# Altium PCB PCB1.PcbDoc
Units mm, origin at the board's own origin, x right, y up, seen from the top; angles counter-clockwise.
Board outline 52.25 x 30.25 mm, 2 copper layers (Top Layer, Bottom Layer); 57 components, 48 nets, 187 pads, 54 vias.
Unrouted connection lines stored in the file: 117.
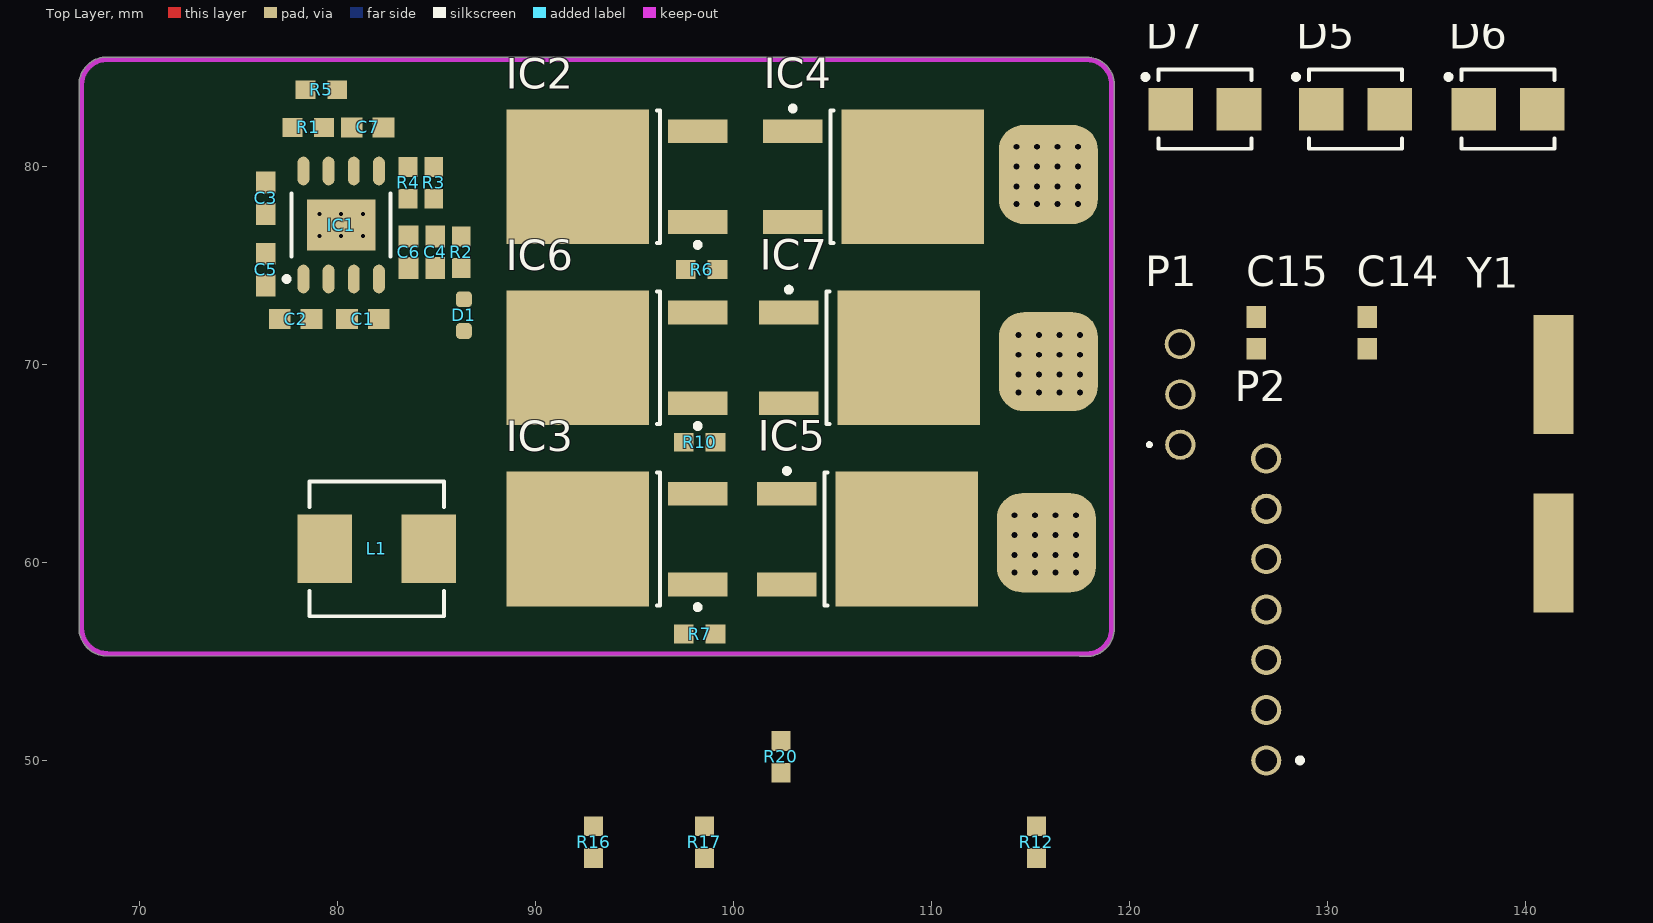
[diagram p0: Top Layer view]
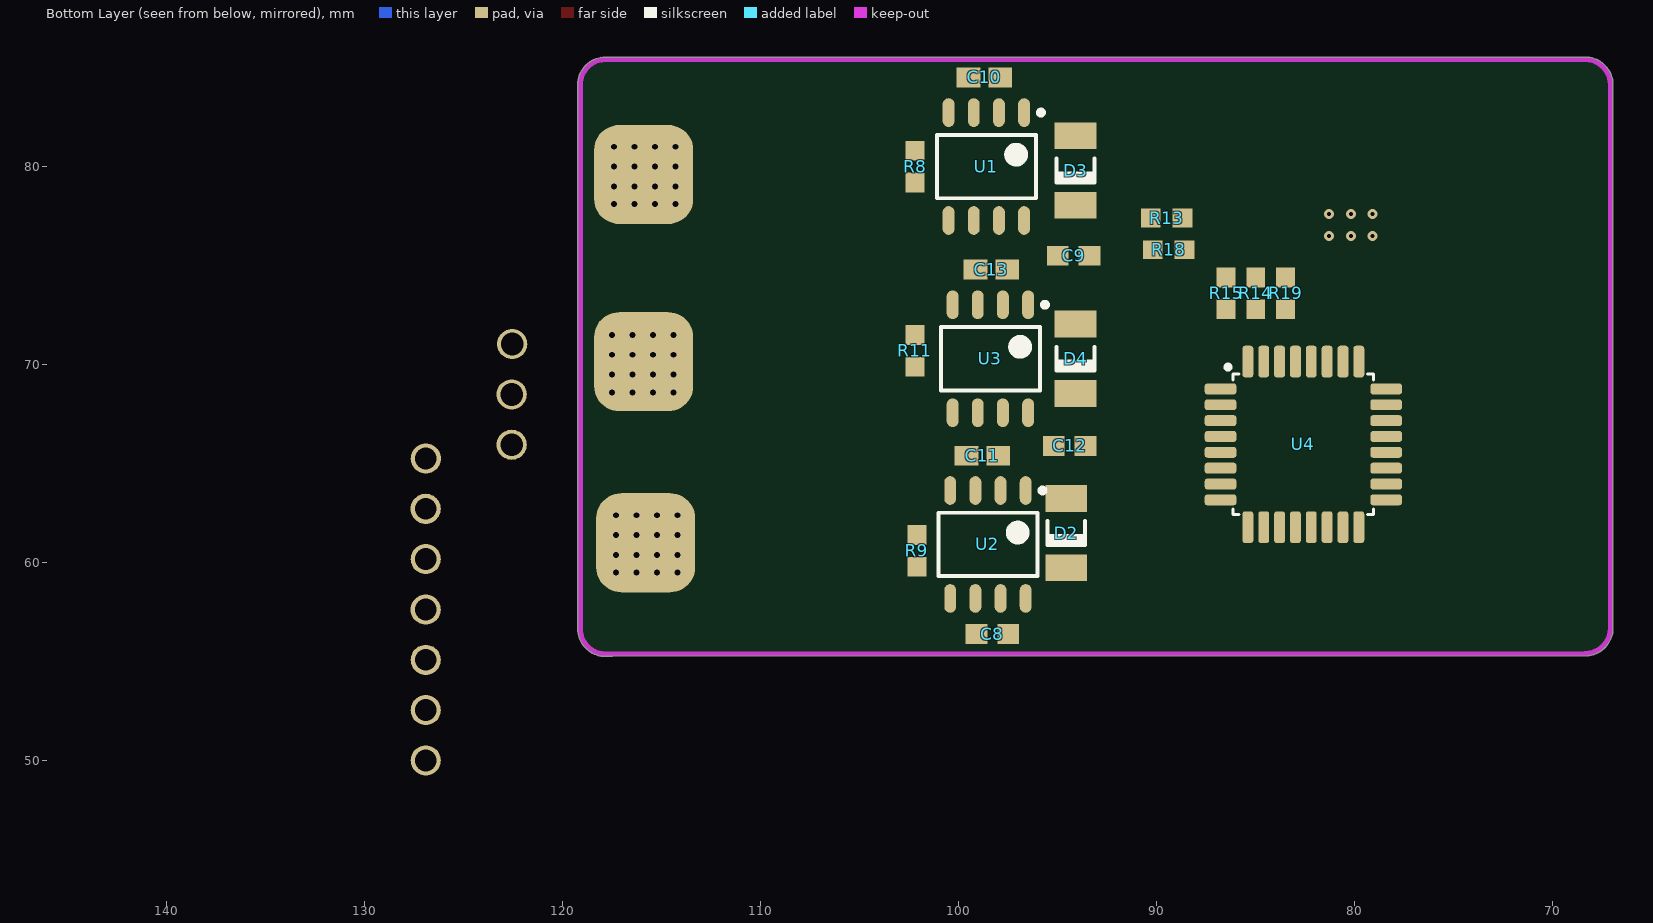
[diagram p1: Bottom Layer view, seen from below]

## Layer stack, top to bottom
Top Solder: solder mask 0.0102, Solder Resist, Dk 3.5
Top Layer: signal copper 0.0356
Dielectric 1: dielectric 0.32, FR-4, Dk 4.8
Bottom Layer: signal copper 0.0356
Bottom Solder: solder mask 0.0102, Solder Resist, Dk 3.5

## Board outline
66.973,56.7 ccw(c68.37,56.7) 68.177,55.316 68.24,55.3 117.5,55.273 117.83,55.273 ccw(c117.83,56.67) 119.227,56.67 119.227,84.13 ccw(c117.83,84.13) 117.831,85.527 117.83,85.527 68.371,85.527 68.37,85.527 ccw(c68.37,84.13) 66.973,84.13

## Design rules (kind name [scope] priority, off if disabled: settings)
Clearance "Clearance for EARTH" [InNet('EARTH') vs InNet('GND')] p1: gap=1 ignorepadtopadclearanceinfootprint=TRUE
Clearance "Clearance General" [All] p2: gap=0.254 ignorepadtopadclearanceinfootprint=TRUE except(0.152: Arc-Arc Arc-Track Arc-SMDPad Arc-Poly Track-Track Track-Poly SMDPad-SMDPad SMDPad-Poly THPad-Poly Via-Poly Fill-Poly Poly-Poly; 0.2: Track-THPad)
DiffPairsRouting Diff100 [InDifferentialPairClass('DIFF100')] p1: maxlimit=0.3 minlimit=0.127 mostfreqgap=0.127 toplayer_minwidth=0.116 toplayer_maxwidth=0.116 toplayer_prefwidth=0.116 bottomlayer_minwidth=0.116 bottomlayer_maxwidth=0.116 bottomlayer_prefwidth=0.116 impedanceprofiledriven=TRUE impedanceprofileid={629E0CA5-21C3-4CA6-A62A-6AAFF73C2E2F} maxuncoupledlength=12.7
DiffPairsRouting Diff90 [InDifferentialPairClass('DIFF100')] p2: maxlimit=0.3 minlimit=0.127 mostfreqgap=0.127 toplayer_minwidth=0.15 toplayer_maxwidth=0.15 toplayer_prefwidth=0.15 bottomlayer_minwidth=0.15 bottomlayer_maxwidth=0.15 bottomlayer_prefwidth=0.15 impedanceprofiledriven=TRUE impedanceprofileid={F15CAFDC-E6BC-4055-B4AB-5316CE726968} maxuncoupledlength=12.7
HoleSize [All] p1: absolutevalues=TRUE maxlimit=6.35 minlimit=0.25 maxpercent=80.000 minpercent=20.000
MinimumSolderMaskSliver [All] p1: minsoldermaskwidth=0.09
PlaneConnect [All] p1: planeconnectstyle=Direct reliefexpansion=0.508 reliefentries=4 reliefconductorwidth=0.254 reliefairgap=0.254
PolygonConnect [All] p1: connectstyle=Direct reliefconductorwidth=0.254 reliefentries=4 polygonreliefangle="90 Angle" airgapwidth=0.254
RoutingVias [All] p1: holewidth=0.3 width=0.6 viastyle="Through Hole" minholewidth=0.25 minwidth=0.45 maxholewidth=0.9 maxwidth=1.27
SilkToSilkClearance [All] p1: silktosilkclearance=0.17
SilkToSolderMaskClearance [IsText] p1: minsilkscreentomaskgap=0.254 clearancetoexposedcopper=TRUE
SolderMaskExpansion [All] p1: expansion=0.045 istentingtop=FALSE
Width [All] p1: maxlimit=2 minlimit=0.152 preferedwidth=0.254
24 further rules are at their usual default settings.

## Classes and differential pairs
component class MP2307: C1 C2 C3 C4 C5 C6 C7 D1 IC1 L1 R1 R2 R3 R4 R5
component class MosfetDrivers: C8 C9 C10 C11 C12 C13 D2 D3 D4 D5 D6 D7 IC2 IC3 IC4 IC5 IC6 IC7 R6 R7 R8 R9 R10 R11 U1 U2 U3
component class Atmega328PB: C14 C15 P1 P2 R12 R13 R14 R15 R16 R17 R18 R19 R20 U4 Y1

## Components (designator, comment, footprint, x,y, rotation, side; value= is the part's Value field where it differs from the comment)
C1 "10nF 50VDC" 0603_UnP_Capacitor 81.3,72.3 r180 top
C2 "10uF 25VDC" 0603_UnP_Capacitor 77.9,72.3 r180 top
C3 "100nF 50VDC" 0603_UnP_Capacitor 76.4,78.4 r90 top
C4 "22uF 6.3VDC" 0603_UnP_Capacitor 84.948,75.675 r90 top
C5 "10uF 25VDC" 0603_UnP_Capacitor 76.4,74.8 r270 top
C6 "22uF 6.3VDC" 0603_UnP_Capacitor 83.604,75.675 r90 top
C7 "3.9nF 50VDC" 0603_UnP_Capacitor 81.534,81.975 r180 top
C8 "2.2uF 50VDC" 0603_UnP_Capacitor 98.3,56.4 r0 bottom
C9 "2.2uF 50VDC" 0603_UnP_Capacitor 94.2,75.5 r0 bottom
C10 "10uF 50VDC" 0805_Capacitor_Special_CC0805KKX7R9BB106 98.7,84.5 r180 bottom
C11 "10uF 50VDC" 0805_Capacitor_Special_CC0805KKX7R9BB106 98.8,65.4 r180 bottom
C12 "2.2uF 50VDC" 0603_UnP_Capacitor 94.4,65.9 r0 bottom
C13 "10uF 50VDC" 0805_Capacitor_Special_CC0805KKX7R9BB106 98.35,74.8 r180 bottom
C14 "18pF 50VDC" 0603_UNP_CAP 132,71.6 r90 top
C15 "18pF 50VDC" 0603_UNP_CAP 126.4,71.6 r90 top
D1 "0603 LED RED" "LED DIODE 0603" 86.4,72.5 r270 top
D2 "500mA 100V" 1N4148_DIODE 94.571,61.5 r270 bottom
D3 "500mA 100V" 1N4148_DIODE 94.1,79.8 r270 bottom locked
D4 "500mA 100V" 1N4148_DIODE 94.1,70.3 r270 bottom
D5 "SMBJ18CA" SMBJ18CA-TKS 131.4,82.9 r0 top
D6 "SMBJ18CA" SMBJ18CA-TKS 139.1,82.9 r0 top
D7 "SMBJ18CA" SMBJ18CA-TKS 123.8,82.9 r0 top
IC1 "Buck Converter" MP2307_SOIC127P600X170_HS-9N 80.204,77.05 r90 top
IC2 "IRLR7843TRPBF - 161A 30V" IRLR7843_DPAK229P991X239-3N 94.1,79.49 r180 top locked
IC3 "IRLR7843TRPBF - 161A 30V" IRLR7843_DPAK229P991X239-3N 94.1,61.2 r180 top locked
IC4 "IRLR7843TRPBF - 161A 30V" IRLR7843_DPAK229P991X239-3N 107.1,79.49 r0 top locked
IC5 "IRLR7843TRPBF - 161A 30V" IRLR7843_DPAK229P991X239-3N 106.8,61.2 r0 top locked
IC6 "IRLR7843TRPBF - 161A 30V" IRLR7843_DPAK229P991X239-3N 94.1,70.345 r180 top locked
IC7 "IRLR7843TRPBF - 161A 30V" IRLR7843_DPAK229P991X239-3N 106.9,70.345 r0 top locked
L1 "10UH 4A" IHLP-2525CZ-11_INDUCTOR 82,60.7 r0 top
P1 "3-Pin Female Header 2.54mm" "1X3 PIN FEMALE HEADER 2.54MM" 122.8,68.5 r90 top
P2 "7-Pin Female Header 2.54mm" "SINGLE 7-PIN (2.54MM) FEMALE HEADER" 126.276,57.172 r90 top
R1 "100K Ohms 1% 1/4W" 0603_RESISTOR_CASE 78.54,81.975 r180 top
R2 "100 Ohms 1% 1/10W" 0603_RESISTOR_CASE 86.267,75.675 r270 top
R3 "44.2K Ohms 0.1% 1/10W" 0603_RESISTOR_CASE 84.873,79.175 r90 top
R4 "10K Ohms 1% 1/10W" 0603_RESISTOR_CASE 83.579,79.175 r90 top
R5 "6.8K Ohms 5% 1/10W" 0603_RESISTOR_CASE 79.201,83.875 r0 top
R6 "100 Ohms 1% 1/10W" 0603_RESISTOR_CASE 98.4,74.8 r0 top
R7 "100 Ohms 1% 1/10W" 0603_RESISTOR_CASE 98.3,56.4 r0 top
R8 "100 Ohms 1% 1/10W" 0603_RESISTOR_CASE 102.2,80 r90 bottom locked
R9 "100 Ohms 1% 1/10W" 0603_RESISTOR_CASE 102.109,60.6 r90 bottom
R10 "100 Ohms 1% 1/10W" 0603_RESISTOR_CASE 98.3,66.081 r0 top
R11 "100 Ohms 1% 1/10W" 0603_RESISTOR_CASE 102.209,70.7 r90 bottom
R12 "33K Ohms 5% 1/10W-S" 0603_RESISTOR_CASE 115.3,45.9 r90 top
R13 "33K Ohms 5% 1/10W-S" 0603_RESISTOR_CASE 89.5,77.4 r180 bottom
R14 "33K Ohms 5% 1/10W-S" 0603_RESISTOR_CASE 85,73.6 r90 bottom
R15 "33K Ohms 5% 1/10W-S" 0603_RESISTOR_CASE 86.5,73.6 r270 bottom
R16 "33K Ohms 5% 1/10W-S" 0603_RESISTOR_CASE 92.948,45.9 r90 top
R17 "33K Ohms 5% 1/10W-S" 0603_RESISTOR_CASE 98.536,45.9 r90 top
R18 "10K Ohms 1% 1/10W" 0603_RESISTOR_CASE 89.4,75.8 r0 bottom
R19 "10K Ohms 1% 1/10W" 0603_RESISTOR_CASE 83.5,73.6 r90 bottom
R20 "10K Ohms 1% 1/10W" 0603_RESISTOR_CASE 102.4,50.2 r90 top
U1 "IR2101" IR2101_SOIC127P600X175-8N 98.6,80 r270 bottom
U2 "IR2101" IR2101_SOIC127P600X175-8N 98.521,60.926 r270 bottom
U3 "IR2101" IR2101_SOIC127P600X175-8N 98.4,70.3 r270 bottom
U4 "ATMEGA328PB-AU" ATMEGA328PB-AU 82.6,65.976 r180 bottom
Y1 "CRYSTAL 16MHZ 20PF" 16MHZ_CRSYTALOSCILLATOR 141.4,65 r90 top

## Footprints (in the part's own frame and the unit in brackets; to place one, negate y for a bottom-side part, rotate by r counter-clockwise, add the part's x,y. Pads: shape width x height; smd on the part's side, far side on the other; paste and mask are expansions set on the pad)
1N4148_DIODE [mm] "MELF Diode, 2-Leads, Body 3,60x1,80mm, IPC Medium Density"
  rect 1.35x2.1 smd: 1(-1.75,0) 2(1.75,0)
  silkscreen extent -0.6,-0.95 0.6,0.95, body extent -1.95,-1 1.95,1, height 2
"1X3 PIN FEMALE HEADER 2.54MM" [mil] "2.54mm"
  round 60 hole 45.28: 1(-100.13,9.38) 2(0,9.38) 3(100.13,10.31)
  silkscreen extent -102,69 -98,73, body extent -160,-39 160,59, height 197
16MHZ_CRSYTALOSCILLATOR [mm]
  rect 6x2 smd: 1(-4.5,0) 2(4.5,0)
0603_RESISTOR_CASE [mm] "Chip Resistor, 2-Leads, Body 1,70x0,88mm, IPC Medium Density"
  rect 1x0.95 smd: 1(-0.8,0) 2(0.8,0)
  body extent -0.9,-0.48 0.9,0.48, height 0.6
0603_UNP_CAP [mm]
  rect 1.1x1 smd: 1(-0.8,0) 2(0.8,0)
  body extent -0.9,-0.48 0.9,0.48, height 0.9
0603_UnP_Capacitor [mm]
  rect 1.1x1 smd: 1(-0.8,0) 2(0.8,0)
  body extent -0.9,-0.48 0.9,0.48, height 0.9
0805_Capacitor_Special_CC0805KKX7R9BB106 [mm]
  rect 1.2x1 smd: 1(-0.8,0) 2(0.8,0)
  body extent -1.1,-0.72 1.1,0.72, height 0.9
ATMEGA328PB-AU [mm]
  rrect50% 1.6x0.55 smd: 1(-4.18,2.8) 2(-4.18,2) 3(-4.18,1.2) 4(-4.18,0.4) 5(-4.18,-0.4) 6(-4.18,-1.2) 7(-4.18,-2) 8(-4.18,-2.8) 17(4.18,-2.8) 18(4.18,-2) 19(4.18,-1.2) 20(4.18,-0.4) 21(4.18,0.4) 22(4.18,1.2) 23(4.18,2) 24(4.18,2.8)
  rrect50% 0.55x1.6 smd: 9(-2.8,-4.18) 10(-2,-4.18) 11(-1.2,-4.18) 12(-0.4,-4.18) 13(0.4,-4.18) 14(1.2,-4.18) 15(2,-4.18) 16(2.8,-4.18) 25(2.8,4.18) 26(2,4.18) 27(1.2,4.18) 28(0.4,4.18) 29(-0.4,4.18) 30(-1.2,4.18) 31(-2,4.18) 32(-2.8,4.18)
  silkscreen extent -3.9,-3.55 3.55,4, body extent -4.5,-4.5 4.5,4.5, height 1
IHLP-2525CZ-11_INDUCTOR [mm] "Molded Inductor, 2-Leads, Body 6,60x6,60mm, IPC Medium Density"
  rect 2.75x3.45 smd: 1(-2.625,0) 2(2.625,0)
  silkscreen extent -3.4,-3.4 3.4,3.4, body extent -3.62,-3.4 3.62,3.4, height 3
IR2101_SOIC127P600X175-8N [mm] "SOIC, 8-Leads, Body 4,90x3,90mm, Pitch 1,27mm, IPC Medium Density"
  oval 1.45x0.6 smd: 1(-2.725,1.905) 2(-2.725,0.635) 3(-2.725,-0.635) 4(-2.725,-1.905) 5(2.725,-1.905) 6(2.725,-0.635) 7(2.725,0.635) 8(2.725,1.905)
  silkscreen extent -2.85,-2.5 1.6,2.88, body extent -2,-2.5 2,2.5, height 1.75
IRLR7843_DPAK229P991X239-3N [mm] "D-PAK, 3-Pads, Body 6,21x6,73mm (max), IPC Medium Density"
  rect 3x1.2 smd: 1(-4.1,2.29) 3(-4.1,-2.29)
  rect 7.2x6.8 smd: 4(1.95,0)
  silkscreen extent -4.23,-3.35 -2.05,3.56, body extent -4.35,-3.37 5.56,3.37, height 2.52
"LED DIODE 0603" [mm] "0603"
  rrect50% 0.8x0.8 smd: +(-0.8,0) -(0.8,0)
  body extent -0.8,-0.4 0.8,0.4, height 0.55
MP2307_SOIC127P600X170_HS-9N [mm] "SOIC, 8-Leads, Body 4,90x3,90mm, Pitch 1,27mm, Thermal Pad 3,45x2,56mm, IPC Medium Density"
  oval 1.45x0.6 smd: 1(-2.725,1.905) 2(-2.725,0.635) 3(-2.725,-0.635) 4(-2.725,-1.905) 5(2.725,-1.905) 6(2.725,-0.635) 7(2.725,0.635) 8(2.725,1.905)
  rect 2.56x3.45 smd: 9(0,0)
  silkscreen extent -2.85,-2.5 1.6,2.88, body extent -2,-2.5 2,2.5, height 1.7
"SINGLE 7-PIN (2.54MM) FEMALE HEADER" [mil]
  round 60 hole 43.31: 1(-281.5,-24.6) 2(-181.3,-24.6) 3(-81.57,-24.58) 4(18.31,-24.74) 5(118.75,-24.56) 6(218.63,-24.72) 7(318.51,-24.43)
  silkscreen extent -286,-96 -276,-87, body extent -341,-74 378,25, height 197
SMBJ18CA-TKS [mm] "Molded Capacitor, 2-Leads, Body 4,38x3,62mm, IPC Medium Density"
  rect 2.25x2.15 smd: 1(-1.725,0) 2(1.725,0)
  silkscreen extent -3.12,-2 2.35,2, body extent -2.57,-1.97 2.57,1.97, height 2.7

## Part data
C1: library part "CL10B103KB8NNNC - MLCC (1608) 0603 10nF 50VDC ±10% X7R", "CL10B103KB8NNNC - MLCC (1608) 0603 10nF 50VDC ±10% X7R", Capacitor Type=Unpolarized, Capacitor Value=10nF, Manufacturer=SAMSUNG, Max Working Voltage=50V, Package / Case=0603, Part Number=CL10B103KB8NNNC, ComponentLink1Description="New link", ComponentLink1URL=https://www.ozdisan.com/passive-components/resistors/smt-smd-and-chip-resistors/PS03W4F1003T5E/592727, Library Ref=Capacitors
C2 C5: library part "MCF03MTX250106 - MLCC 0603 10uF 25VDC ±20% X5R", "MCF03MTX250106 - MLCC (1608) 0603 10uF 25VDC ±20% X5R", Capacitor Type=Ceramic, Capacitor Value=10uF, Manufacturer=VIKING, Max Working Voltage=25VDC, Package / Case=0603, Part Number=MCF03MTX250106, ComponentLink1Description="New link", ComponentLink1URL=https://www.ozdisan.com/passive-components/resistors/smt-smd-and-chip-resistors/PS03W4F1003T5E/592727, Library Ref=Capacitors
C3: library part "MCF03KTB500104 - MLCC 0603 100nF 50VDC ±10% X7R", "MCF03KTB500104 - MLCC (1608) 0603 100nF 50VDC ±10% X7R", Capacitor Type=Ceramic, Capacitor Value=100nF, Manufacturer=VIKING, Max Working Voltage=50VDC, Package / Case=0603, Part Number=MCF03MTX250106, ComponentLink1Description="New link", ComponentLink1URL=https://www.ozdisan.com/passive-components/resistors/smt-smd-and-chip-resistors/PS03W4F1003T5E/592727, Library Ref=Capacitors
C4 C6: library part "CL10A226MQ8NRNC - MLCC (1608) 0603 22uF 6.3VDC ±20% X5R", "CL10A226MQ8NRNC - MLCC (1608) 0603 22uF 6.3VDC ±20% X5R", Capacitor Type=Unpolarized, Capacitor Value=22uF, Manufacturer=SAMSUNG, Max Working Voltage=6.3V, Package / Case=0603, Part Number=CL10B103KB8NNNC, ComponentLink1Description="New link", ComponentLink1URL=https://www.ozdisan.com/passive-components/capacitors/smt-smd-and-mlcc-capacitors/CL10B392KB8NNNC/26336, Library Ref=Capacitors
C7: library part "CL10B392KB8NNNC - MLCC (1608) 0603 3.9nF 50VDC ±10% X7R", "CL10B392KB8NNNC - MLCC (1608) 0603 3.9nF 50VDC ±10% X7R", Capacitor Type=Unpolarized, Capacitor Value=3.9nF, Manufacturer=SAMSUNG, Max Working Voltage=50V, Package / Case=0603, Part Number=CL10B103KB8NNNC, ComponentLink1Description="New link", ComponentLink1URL=https://www.ozdisan.com/passive-components/capacitors/smt-smd-and-mlcc-capacitors/CL10B392KB8NNNC/26336, Library Ref=Capacitors
C8 C9 C12: library part "UMK107BBJ225KA-T - MLCC 0603 2.2uF 50VDC ±10% X5R", "UMK107BBJ225KA-T - MLCC 0603 2.2uF 50VDC ±10% X5R", Capacitor Type=Ceramic, Capacitor Value=2.2uF, Manufacturer=YUDEN, Max Working Voltage=50V, Package / Case=0603, Part Number=UMK107BBJ225KA-T, ComponentLink1Description="New link", ComponentLink1URL=https://www.ozdisan.com/passive-components/resistors/smt-smd-and-chip-resistors/PS03W4F1003T5E/592727, Library Ref=Capacitors
C10 C11 C13: library part "CC0805KKX7R9BB106 - MLCC 0805 10uF 50VDC ±10% X7R", "CC0805KKX7R9BB106 - MLCC 0805 10uF 50VDC ±10% X7R", Capacitor Type=Unpolarized, Capacitor Value=10uF, Manufacturer=YAGEO, Max Working Voltage=50VDC, Package / Case=0805, Part Number=CC0805KKX7R9BB106, ComponentLink1Description="New link", ComponentLink1URL=https://www.ozdisan.com/passive-components/capacitors/smt-smd-and-mlcc-capacitors/CL10B392KB8NNNC/26336, Library Ref=Capacitors
C14 C15: library part "MCF03JTN500180 - MLCC 0603 18pF 50VDC ±5% C0G (NP0)", "MCF03JTN500180 - MLCC (1608) 0603 18pF 50VDC ±5% C0G (NP0)", Capacitor Type=Ceramic, Capacitor Value=18pF, Manufacturer=VIKING, Max Working Voltage=50VDC, Package / Case=0603, Part Number=MCF03MTX250106, ComponentLink1Description="New link", ComponentLink1URL=https://www.ozdisan.com/passive-components/resistors/smt-smd-and-chip-resistors/PS03W4F1003T5E/592727, Library Ref=Capacitors
D1: Color=Red, Package / Case=0603, Library Ref=LED, Type=SMD
D2 D3 D4: library part "1N4148-35_AY_10001 - DIODE SWITCHING Single 500mA 100V THT DO35", "1N4148-35_AY_10001 - DIODE SWITCHING Single 500mA 100V THT DO35", Diode Types=Switching, Library Ref=Diodes
D5 D6 D7: library part "SMBJ18CA-TKS - DIODE TVS 600W 18V DO214AA", "SMBJ18CA-TKS - DIODE TVS 600W 18V DO214AA (SMB) SMT", Package=SMD, Availability=Available, Diode Direction=Bidirectional, Library Ref=Diodes, MF="THINKING ELECTRONIC", MP=SMBJ18CA-TKS, Price=None, Type=TVS
IC1: library part MP2307, "3A and 4.75V-23V voltage regulator.", Package / Case=SMD, Converter Type=Buck, Library Ref="Voltage Regulators"
IC2 IC3 IC4 IC5 IC6 IC7: library part "IRLR7843TRPBF - MOSFET DIS.161A 30V N-CH TO252(DPAK) HEXFET SMT", "IRLR7843TRPBF - MOSFET DIS.161A 30V N-CH TO252(DPAK) HEXFET SMT", Package / Case=D-Pack, Library Ref=Mosfets, Mosfet Type=N
L1: library part "IHLP2525CZER100M11 - INDUCTOR FIXED 10UH 4A 71.2MOHM SMD", "IHLP2525CZER100M11 - INDUCTOR FIXED 10UH 4A 71.2MOHM SMD", Package / Case=THT, Rated Current (Max)=4A, Working Voltage (Max)=50V, Inductance Value="10 µH", Inductor Type="Iron Core", Library Ref=Inductors
P1: library part "Single 3-Pin (2.54mm) Female Header", Library Ref=Header
P2: library part "Single 7-Pin (2.54mm) Female Header", Library Ref=Header
R1: library part "PS03W4F1003T5E - 0603 100K Ohms 1% 1/4W AUTOMOTIV", "RES.(1608) 0603 100K Ohms 1% 1/4W AUTOMOTIV PS03W4F1003T5E", Manufacturer=ROYALOHM, Max Working Voltage=50V, Package / Case=0603, Part Number=PS03W4F1003T5E, Power (Watts)=1/4W, Resistor Value="100K Ohms", ComponentLink1Description="New link", ComponentLink1URL=https://www.ozdisan.com/passive-components/resistors/smt-smd-and-chip-resistors/PS03W4F1003T5E/592727, Library Ref=Resistors
R2 R6 R7 R8 R9 R10 R11: library part "CQ03SAF1000T5E - 0603 100 Ohms 1% 1/10W AUTOMOTIV", "CQ03SAF1000T5E - 0603 100 Ohms 1% 1/10W AUTOMOTIV", Manufacturer=ROYALOHM, Package / Case=0603, Part Number=CQ03SAF1000T5E, Power (Watts)=1/10W, Resistor Value="100 Ohms", Working Voltage (Max)=75V, ComponentLink1Description="New link", ComponentLink1URL=https://www.ozdisan.com/passive-components/resistors/smt-smd-and-chip-resistors/PS03W4F1003T5E/592727, Library Ref=Resistors
R3: library part "TC0325B4422T5F - 0603 44.2K Ohms 0.1% 1/10W 25PPM", "TC0325B4422T5F - RES.(1608) 0603 44.2K Ohms 0.1% 1/10W 25PPM", Manufacturer=ROYALOHM, Max Working Voltage=50V, Package / Case=0603, Part Number=RI0603L104JT, Power (Watts)=1/10W, Resistor Value="44.2K Ohms", ComponentLink1Description="New link", ComponentLink1URL=https://www.ozdisan.com/passive-components/resistors/smt-smd-and-chip-resistors/PS03W4F1003T5E/592727, Library Ref=Resistors
R4 R18 R19 R20: library part "RC0603FR-0710KL - 0603 10K Ohms 1% 1/10W 100PPM", "RC0603FR-0710KL - 0603 10K Ohms 1% 1/10W 100PPM", Manufacturer=HOTTECH, Max Working Voltage=75V, Package / Case=0603, Part Number=PS03W4F1003T5E, Power (Watts)=1/10W, Resistor Value="10K Ohms", ComponentLink1Description="New link", ComponentLink1URL=https://www.ozdisan.com/passive-components/resistors/smt-smd-and-chip-resistors/PS03W4F1003T5E/592727, Library Ref=Resistors
R5: library part "RC0603JR-076K8L - 0603 6.8K Ohms 5% 1/10W 100PPM", "RC0603JR-076K8L - 0603 6.8K Ohms 5% 1/10W 100PPM", Manufacturer=YAGEO, Max Working Voltage=75V, Package / Case=0603, Part Number=RC0603JR-076K8L, Power (Watts)=1/10W, Resistor Value="6.8K Ohms", ComponentLink1Description="New link", ComponentLink1URL=https://www.ozdisan.com/passive-components/resistors/smt-smd-and-chip-resistors/PS03W4F1003T5E/592727, Library Ref=Resistors
R12 R13 R14 R15 R16 R17: library part "0603SAJ0333T5E - RES. 0603 33K Ohms 5% 1/10W-S 100PPM", "0603SAJ0333T5E - RES.(1608) 0603 33K Ohms 5% 1/10W-S 100PPM", Manufacturer=ROYALOHM, Package / Case=0603, Part Number=0603SAJ0333T5E, Power (Watts)=1/10W, Resistor Value="33K Ohms", Working Voltage (Max)=75V, ComponentLink1Description="New link", ComponentLink1URL=https://www.ozdisan.com/passive-components/resistors/smt-smd-and-chip-resistors/PS03W4F1003T5E/592727, Library Ref=Resistors
U1 U2 U3: "High Speed power MOSFET and IGBT driver", Library Ref="Mosfet Controllers"
U4: "ATmega Series 20 MHz 32 KB Flash 2 KB SRAM 8-Bit Microcontroller - TQFP-32", Package / Case=SMD, Availability=Unavailable, Library Ref=Microprocessors, MF="{'manufacturer': u'Microchip Technology'}", Name=ATMEGA328PB-AU, Price=None
Y1: library part "AS-16.000-20-SMD-TR - CRYSTAL 16.0000MHZ 20PF SMD", "AS-16.000-20-SMD-TR - CRYSTAL 16.0000MHZ 20PF SMD", Package / Case=SMD, Part Number=AS-16.000-20-SMD-TR, Button Size=12mm, Library Ref=Oscillator, Oscillator Type=Crystal

## Free pads (board coordinates)
  rrect50% 5x5 smd: 1(115.9,79.6) 2(115.9,70.155) 3(115.8,61.01)
  rrect50% 5x5 smd far side: 1(115.9,79.6) 2(115.9,70.155) 3(115.8,61.01)

## Via types
v1: diameter 0.5, hole 0.3, Top Layer to Bottom Layer, 48 vias
v2: diameter 0.5, hole 0.2, Top Layer to Bottom Layer, 6 vias

## Nets (pads, with @x,y where several pads share a name; then routed paths per layer and width w, separated by ;. In a path a pad name is that pad's centre, name@x,y a point inside that pad or via, vN(x,y) a via of type N, cw(c..) or ccw(c..) an arc to the next point about the centre after c; other vN are vias at no path point)
A0: R12.2 R13.1 R18.2 U4.23
A1: R14.2 R15.1 R19.2 U4.24
A2: R16.2 R17.1 R20.2 U4.25
GND: C3.1 C5.1 C6.1 C10.1 C11.1 C13.1 C14.1 C15.1 D1.- IC1.4 IC4.3 IC5.3 IC7.3 P1.3 P2.1 R4.1 R5.1 R18.1 R19.1 R20.1 U1.4 U2.4 U3.4 U4.5 U4.21
MCU_MISO: P2.6 U4.16
MCU_MOSI: P2.7 U4.15
MCU_RESET: P2.4 U4.29
MCU_SCK0: P2.5 U4.17
NetC1_1: C1.1 IC1.3 L1.1
NetC1_2: C1.2 IC1.1
NetC2_2: C2.2 C5.2
NetC3_2: C3.2 IC1.8
NetC4_1: C4.1 C6.2
NetC7_1: C7.1 R5.2
NetC7_2: C7.2 IC1.6
NetC8_1: C8.1 D2.2 U2.8
NetC8_2: C8.2 IC3.3 IC5.4 pad.3 R17.2 U2.6
  other v1: 114.2,59.5 115.233,59.5 116.267,59.5 117.3,59.5 114.2,60.4 115.233,60.4 116.267,60.4 117.3,60.4 114.2,61.4 115.233,61.4 116.267,61.4 117.3,61.4 114.2,62.4 115.233,62.4 116.267,62.4 117.3,62.4
NetC9_1: C9.1 D3.2 U1.8
NetC9_2: C9.2 IC2.3 IC4.4 pad.1 R13.2 U1.6
  other v1: 114.3,78.1 115.333,78.1 116.367,78.1 117.4,78.1 114.3,79 115.333,79 116.367,79 117.4,79 114.3,80 115.333,80 116.367,80 117.4,80 114.3,81 115.333,81 116.367,81 117.4,81
NetC12_1: C12.1 D4.2 U3.8
NetC12_2: C12.2 IC6.3 IC7.4 pad.2 R15.2 U3.6
  other v1: 114.4,68.6 115.433,68.6 116.467,68.6 117.5,68.6 114.4,69.5 115.433,69.5 116.467,69.5 117.5,69.5 114.4,70.5 115.433,70.5 116.467,70.5 117.5,70.5 114.4,71.5 115.433,71.5 116.467,71.5 117.5,71.5
NetD1_+: D1.+ R2.2
NetR1_1: IC1.7 R1.1
NetR3_2: IC1.5 R3.2 R4.2
NetR6_1: R6.1 U1.7
NetR6_2: IC2.1 R6.2
NetR7_1: R7.1 U2.7
NetR7_2: IC3.1 R7.2
NetR8_1: R8.1 U1.5
NetR8_2: IC4.1 R8.2
NetR9_1: R9.1 U2.5
NetR9_2: IC5.1 R9.2
NetR10_1: R10.1 U3.7
NetR10_2: IC6.1 R10.2
NetR11_1: R11.1 U3.5
NetR11_2: IC7.1 R11.2
NetU1_2: U1.2 U4.10
NetU1_3: U1.3 U4.9
NetU2_2: U2.2 U4.14
NetU2_3: U2.3 U4.13
NetU3_2: U3.2 U4.27
NetU3_3: U3.3 U4.26
PD3: R12.1 R14.1 R16.1 U4.1
POWER_LED: C4.2 L1.2 P1.1 R2.1 R3.1 U4.4 U4.18 U4.20
PWM_READ: P1.2 U4.32
VCC: C2.1 C10.2 C11.2 C13.2 D2.1 D3.1 D4.1 IC1.2 IC2.4 IC3.4 IC6.4 R1.2 U1.1 U2.1 U3.1
XTAL1: C14.2 U4.7 Y1.1
XTAL2: C15.2 U4.8 Y1.2
pads on no net: D5.1 D5.2 D6.1 D6.2 D7.1 D7.2 IC1.9 P2.2 P2.3 U4.2 U4.3 U4.6 U4.11 U4.12 U4.19 U4.22 U4.28 U4.30 U4.31
copper on no net:
  other v2: 79.104,76.5 80.204,76.5 81.304,76.5 79.104,77.6 80.204,77.6 81.304,77.6

## Keep-outs
Keep-Out Layer:
  lines w0.254: 68.24,55.427 117.5,55.4 117.83,55.4 ccw(c117.83,56.67) 119.1,56.67 119.1,57 119.1,84.13 ccw(c117.83,84.13) 117.83,85.4 68.37,85.4 ccw(c68.37,84.13) 67.1,84.13 67.1,56.7 ccw(c68.37,56.7) 68.37,55.43